# Altium PCB RF_REVE.PcbDoc
Units mm, origin at the board's own origin, x right, y up, seen from the top; angles counter-clockwise.
Board outline 95.88 x 101.01 mm, 4 copper layers (Top Layer, Layer 1, Layer 2, Bottom Layer), stack 1.586 mm thick; 16 components, 36 nets, 192 pads, 59 vias.
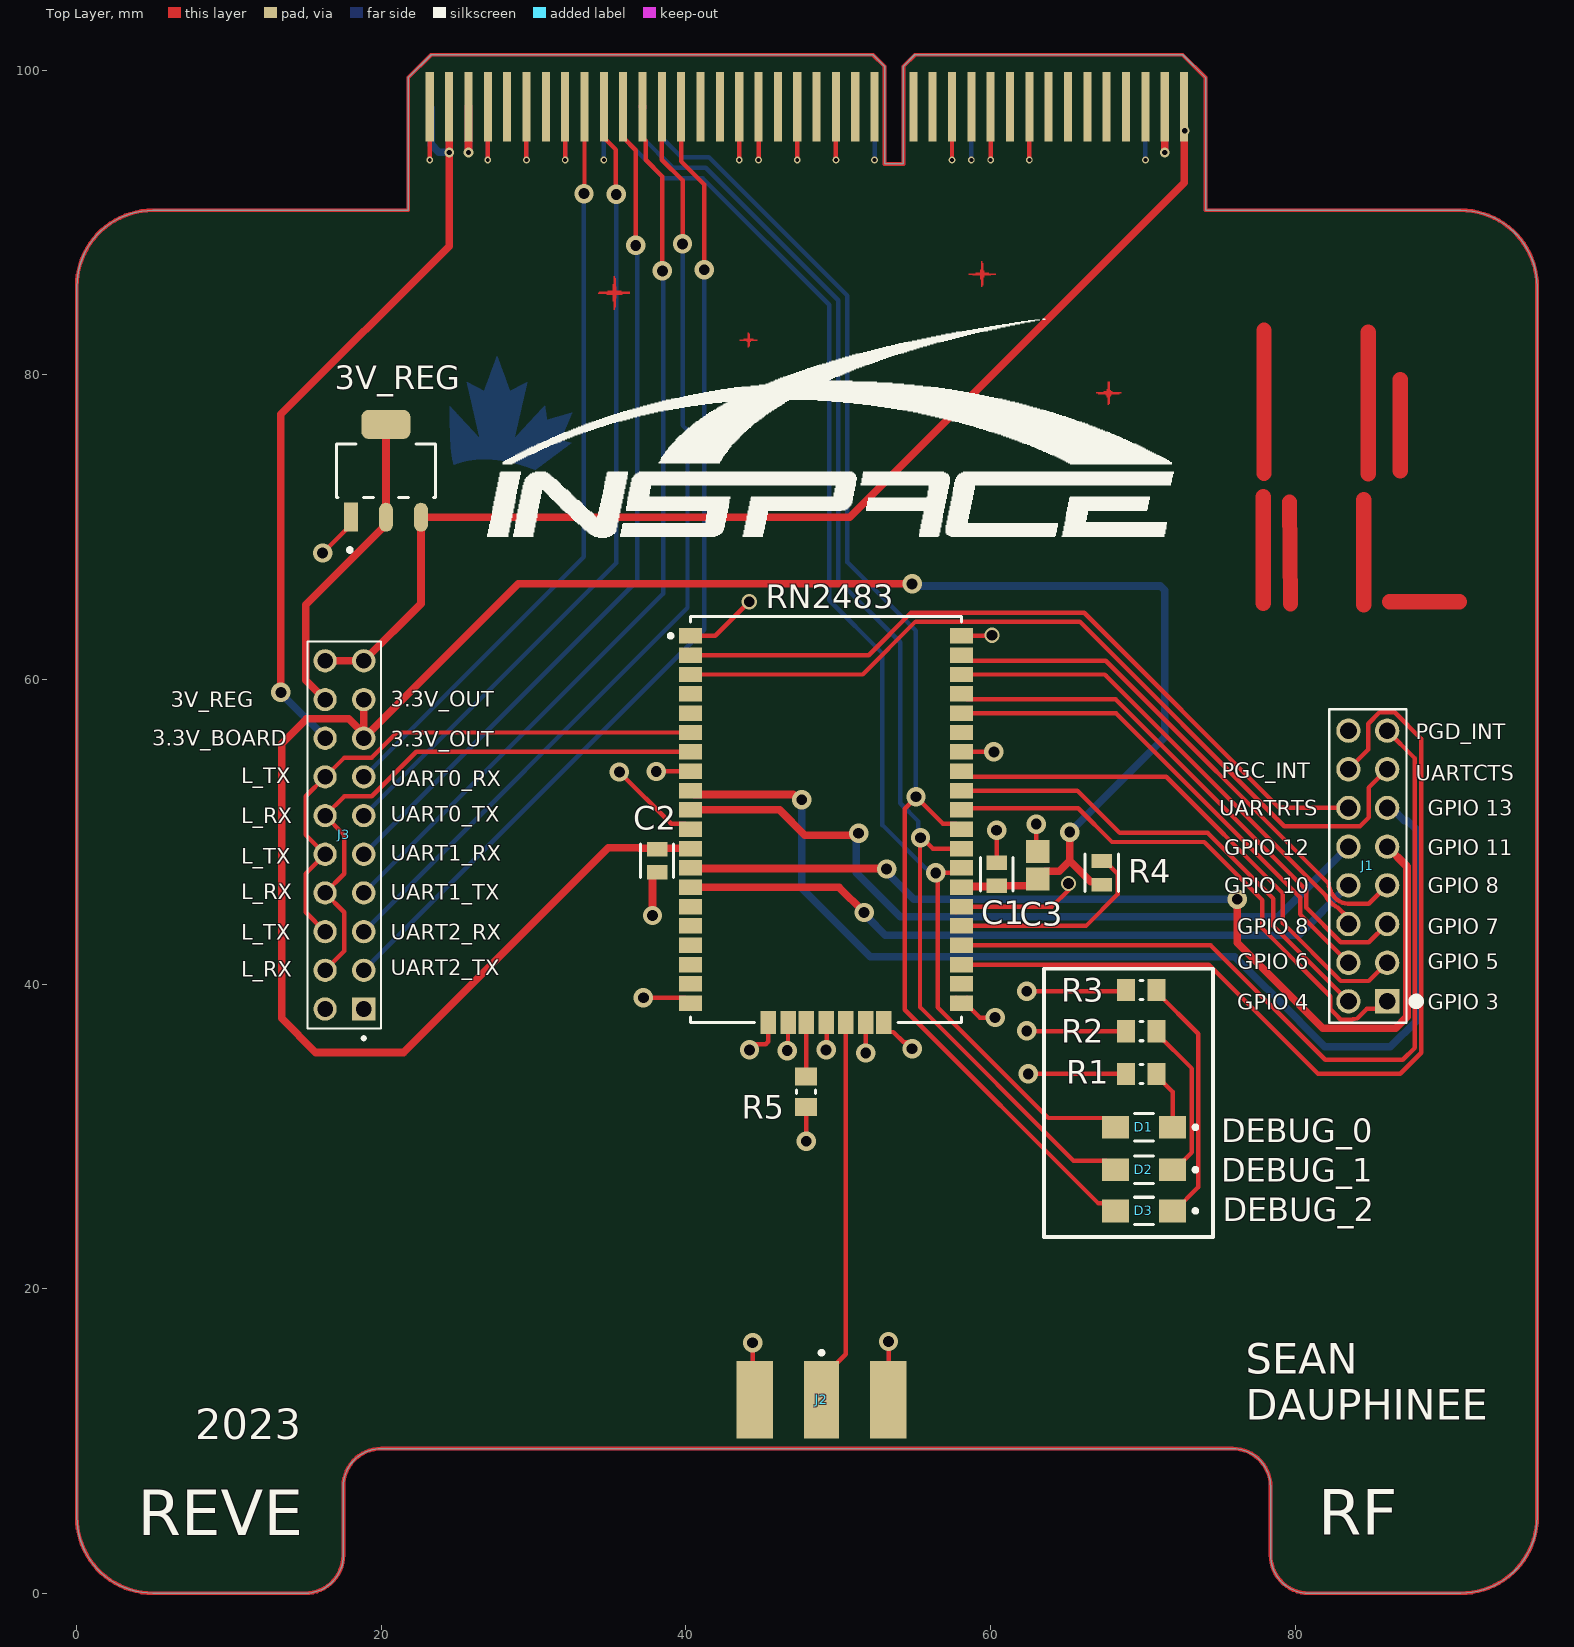
[diagram p0: Top Layer view]
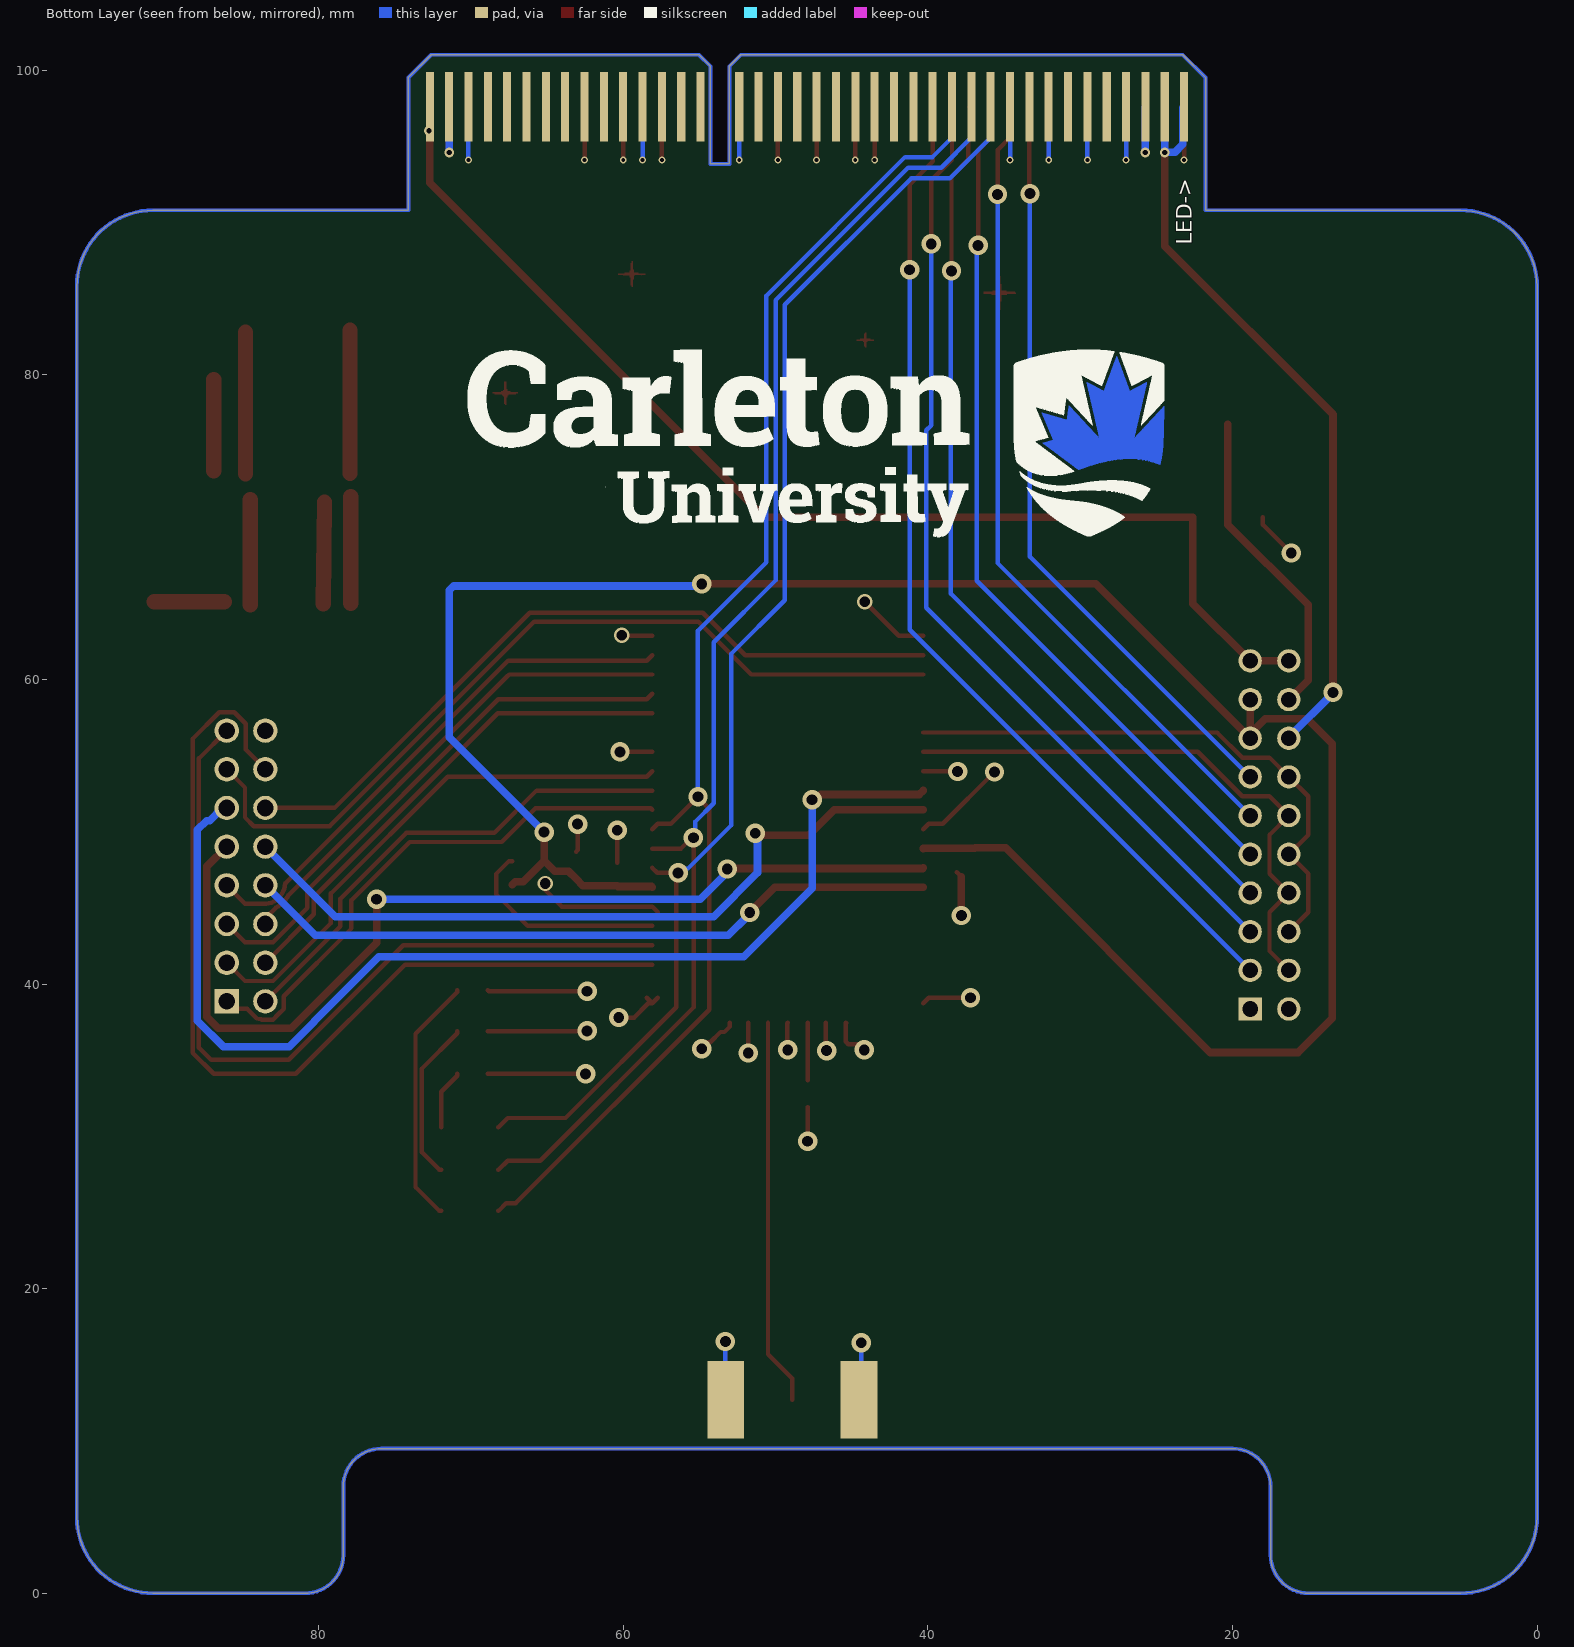
[diagram p1: Bottom Layer view, seen from below]
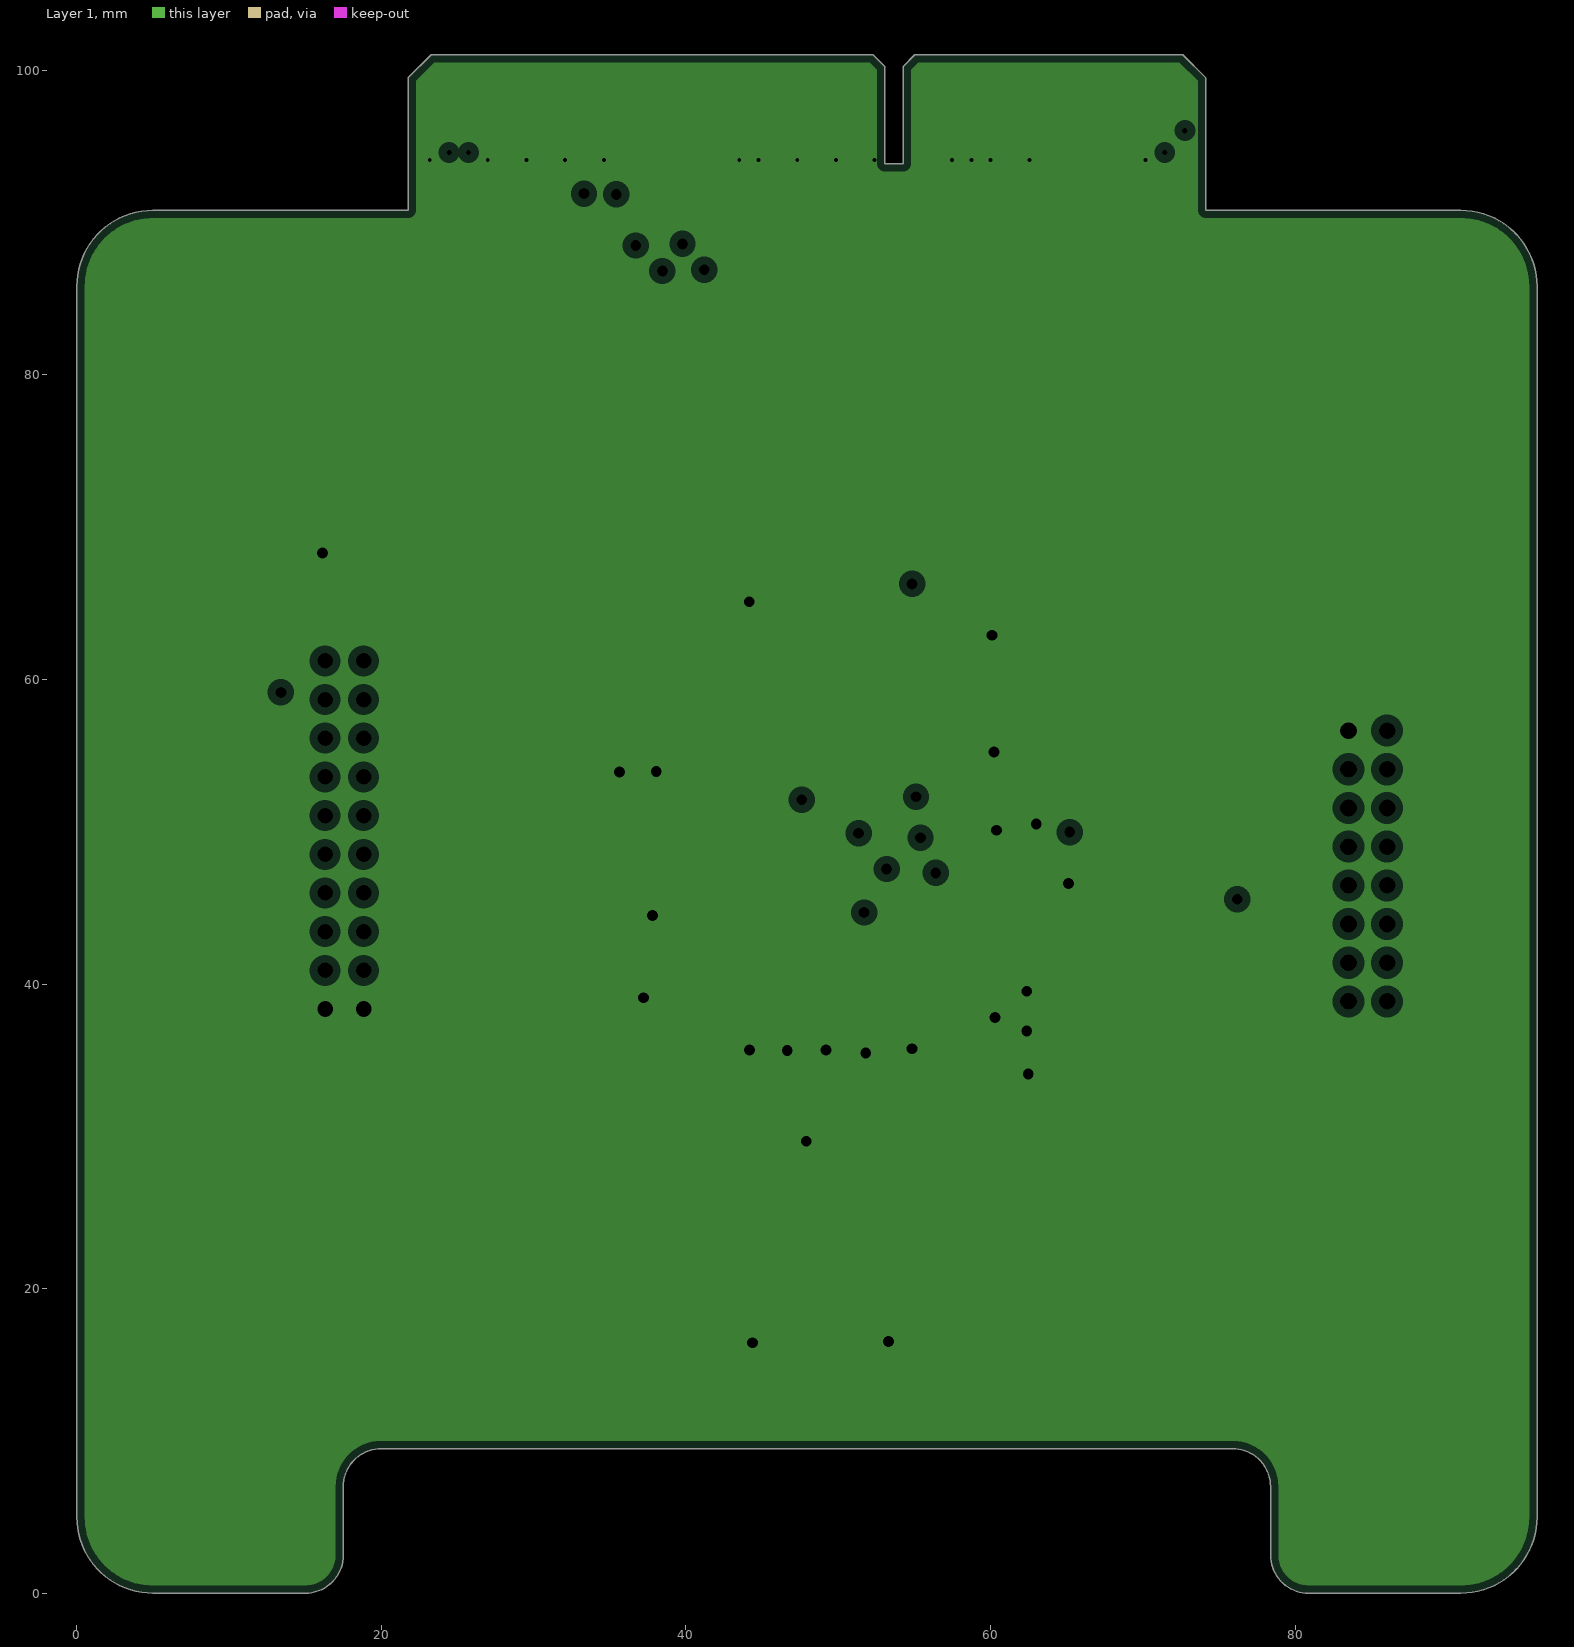
[diagram p2: Layer 1, clearances drawn from the general rule]
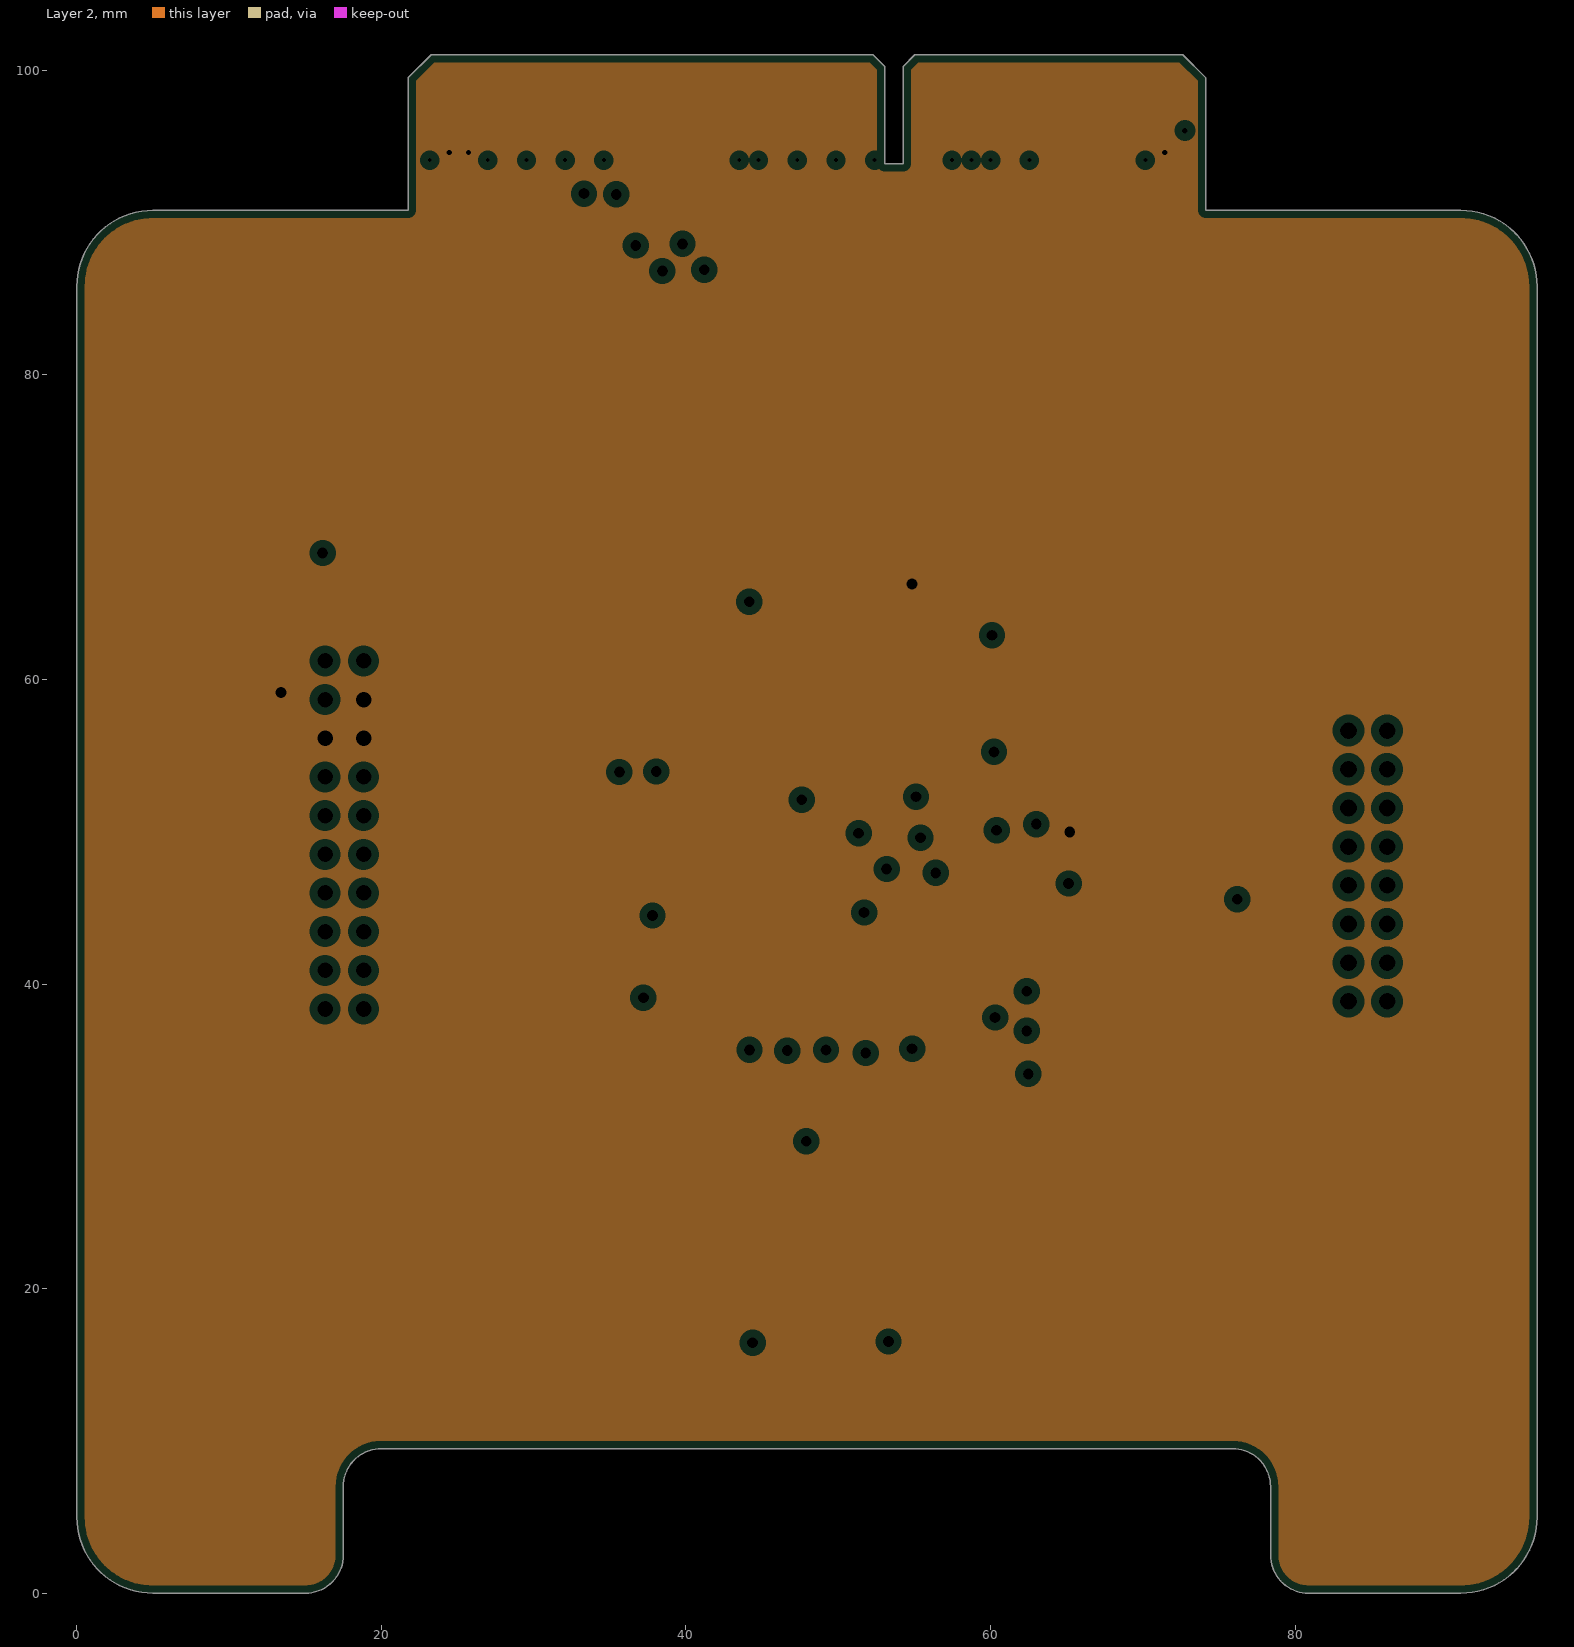
[diagram p3: Layer 2, clearances drawn from the general rule]
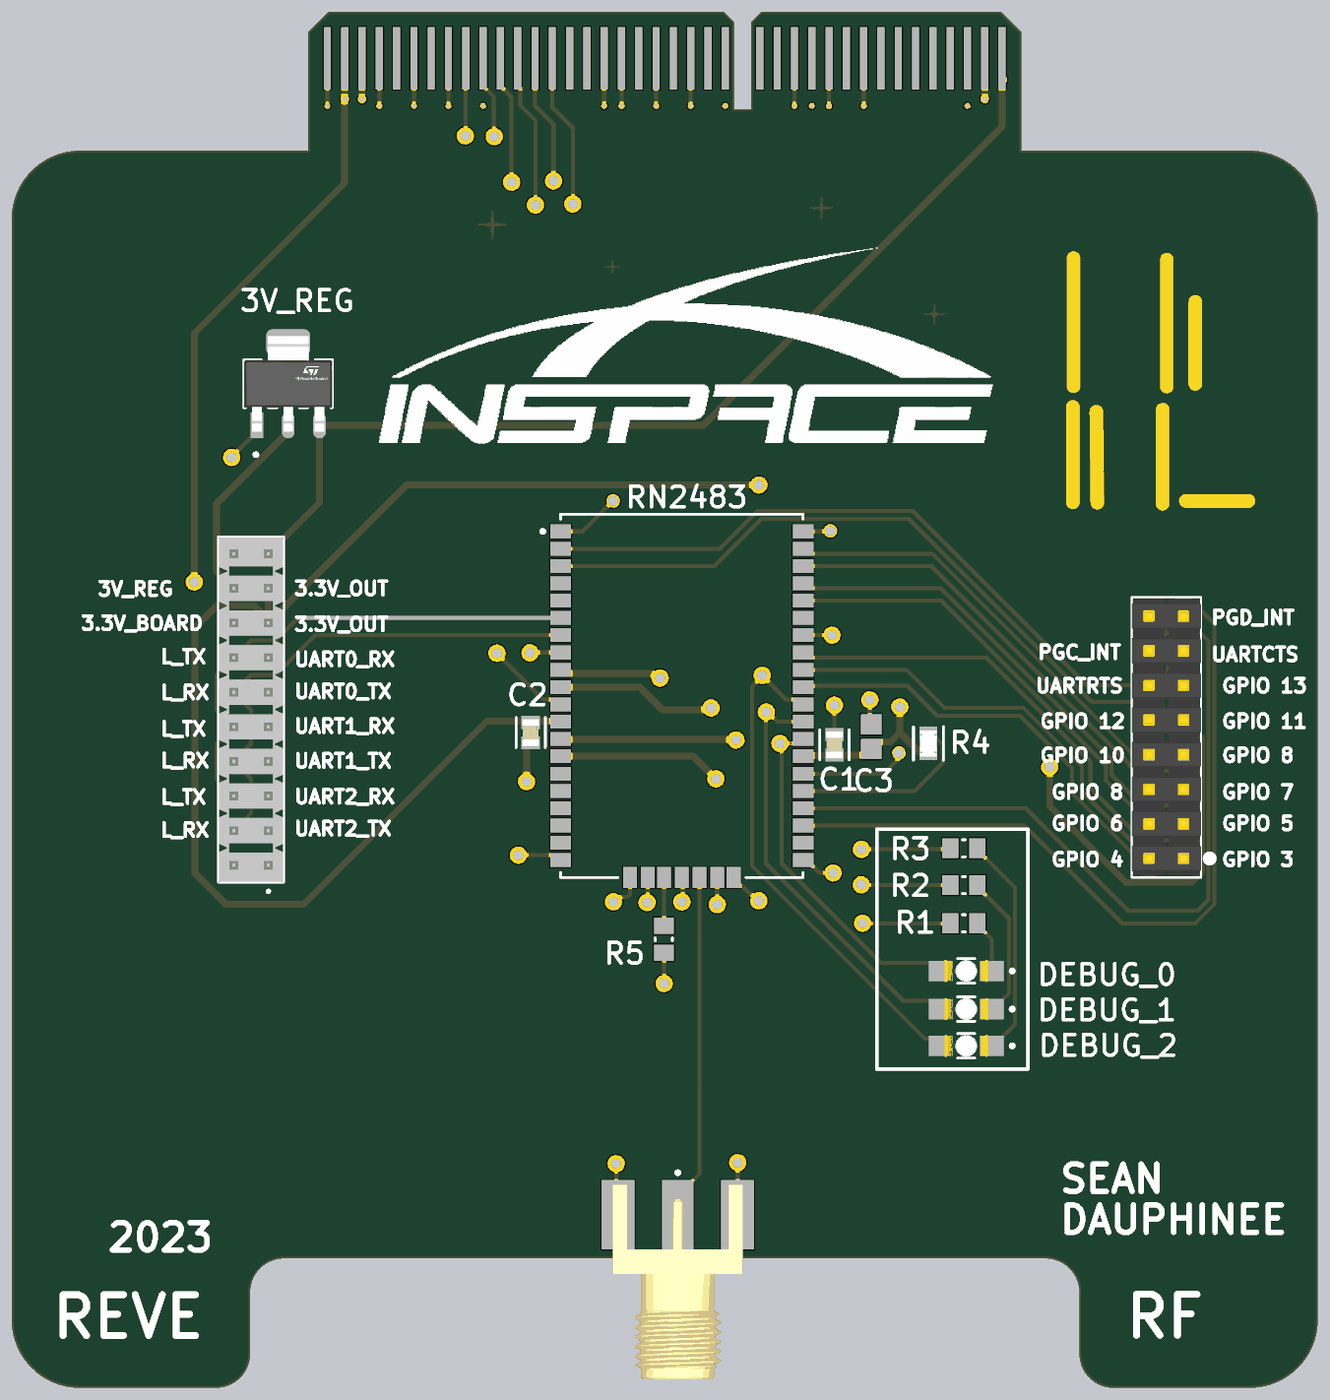
[diagram p4: 3D render of the assembled board from above, using the file's embedded part models]

## Layer stack, top to bottom
Top Solder: solder mask 0.0203, Solder Resist, Dk 3.8
Top Layer: signal copper 0.035
Dielectric 2: prepreg 0.2104, PP-006, Dk 4.6
Layer 1: plane copper 0.0152, net GND
Dielectric 1: dielectric 1.065, FR-4, Dk 4.6
Layer 2: plane copper 0.0152, net +3.3V
Dielectric 3: prepreg 0.2104, PP-006, Dk 4.6
Bottom Layer: signal copper 0.035
Bottom Solder: solder mask 0.0203, Solder Resist, Dk 3.8

## Board outline
5,0 15,0 ccw(c15,2.5) 17.5,2.5 17.5,7 cw(c20,7) 20,9.5 75.885,9.5 cw(c75.885,7) 78.385,7 78.385,2.5 ccw(c80.885,2.5) 80.885,0 90.885,0 ccw(c90.885,5) 95.885,5 95.885,85.805 ccw(c90.885,85.805) 90.885,90.805 74.117,90.805 74.117,99.517 72.617,101.015 55.027,101.015 54.277,100.265 54.277,93.855 53.037,93.855 53.037,100.265 52.287,101.015 23.267,101.015 21.767,99.517 21.768,90.805 5,90.805 ccw(c5,85.805) 0,85.805 0,5 ccw(c5,5)

## Design rules (kind name [scope] priority, off if disabled: settings)
Clearance [All] p1: gap=0.254 ignorepadtopadclearanceinfootprint=TRUE except(0: Arc-Hole Track-Hole SMDPad-Hole THPad-Hole Via-Hole Fill-Hole Poly-Hole Region-Hole Text-Hole; 0.127: Arc-Arc Arc-Track Track-Track SMDPad-SMDPad THPad-THPad)
PlaneClearance [All] p1: clearance=0.508
PlaneConnect [All] p1: pad.planeconnectstyle=Relief pad.reliefexpansion=0.508 pad.reliefentries=4 pad.reliefconductorwidth=0.254 pad.reliefairgap=0.254 via.planeconnectstyle=Direct via.reliefexpansion=0.508 via.reliefentries=4 via.reliefconductorwidth=0.254 via.reliefairgap=0.254
PolygonConnect [All] p1: connectstyle=Relief reliefconductorwidth=0.254 reliefentries=4 polygonreliefangle="90 Angle" airgapwidth=0.254
RoutingVias [All] p1: holewidth=0.254 width=0.445 viastyle="Through Hole" minholewidth=0.2 minwidth=0.4 maxholewidth=6.3 maxwidth=6.4
SolderMaskExpansion [All] p1: expansion=0.102 istentingtop=FALSE
Width [All] p1: maxlimit=2.5 minlimit=0.127 preferedwidth=0.293 minimp=50.000000 maximp=50.000000 favimp=50.000000
28 further rules are at their usual default settings.

## Classes and differential pairs
component class RF_REVE[2]: D1 D2 D3 J2 R1 R2 R3
component class RF_REVE[1]: 3V_REG C1 C2 C3 J1 J3 R4 R5 RN2483

## Components (designator, comment, footprint, x,y, rotation, side; value= is the part's Value field where it differs from the comment)
3V_REG "LDL1117S33R" FP-SOT223-0046067-IPC_B 20.3,73.7 r90 top (schematic designator U2)
C1 "0.1 uF" FP-C0805C-DN-MFG 60.4,47.2 r90 top value="0.10 μF"
C2 "0.1 uF" FP-C0805C-DN-MFG 38.1,48.1 r270 top value="0.10 μF"
C3 "2.2 uF" CAPC2013X145X50ML20T25 63.1,47.8 r270 top
D1 "LED 1" FP-APTD3216CGCK-MFG 70.075,30.6 r180 top
D2 "LED 2" FP-APTD3216CGCK-MFG 70.075,27.8 r180 top
D3 "LED 3" FP-APTD3216CGCK-MFG 70.075,25.1 r180 top
J1 "68602-116HLF" CONN_68602-116HLF_AMP 86.04,38.86 r90 top
J2 "Antenna" CINC-142-0701-801_V 48.9,12.7 r270 top
J3 "10129381-920001BLF" AMPHENOL_10129381-920001BLF 17.57,49.79 r90 top
R1 "1.8k" RESC2013X60X35ML10T20 69.9,34.1 r0 top
R2 "1.8k" RESC2013X60X35ML10T20 69.9,36.9 r0 top
R3 "1.8k" RESC2013X60X35ML10T20 69.9,39.6 r0 top
R4 "10k" FP-MC01W0805-IPC_C 67.3,47.3 r270 top
R5 "50" RESC2013X60X35ML10T20 47.875,32.925 r90 top
RN2483 "RN2483-I/RM095" MCHP-RN2483-47_V 49.2,50.8 r180 top (schematic designator U1)

## Footprints (in the part's own frame and the unit in brackets; to place one, negate y for a bottom-side part, rotate by r counter-clockwise, add the part's x,y. Pads: shape width x height; smd on the part's side, far side on the other; paste and mask are expansions set on the pad)
AMPHENOL_10129381-920001BLF [mm]
  rect 1.53x1.53 hole 1.02: 01(-11.43,-1.27)
  round 1.53 hole 1.02: 02(-11.43,1.27) 03(-8.89,-1.27) 04(-8.89,1.27) 05(-6.35,-1.27) 06(-6.35,1.27) 07(-3.81,-1.27) 08(-3.81,1.27) 09(-1.27,-1.27) 10(-1.27,1.27) 11(1.27,-1.27) 12(1.27,1.27) 13(3.81,-1.27) 14(3.81,1.27) 15(6.35,-1.27) 16(6.35,1.27) 17(8.89,-1.27) 18(8.89,1.27) 19(11.43,-1.27) 20(11.43,1.27)
  silkscreen extent -13.45,-2.41 12.7,2.41, body extent -12.7,-2.41 12.7,2.41, height 3.25
CAPC2013X145X50ML20T25 [mm] "Chip Capacitor, 2-Leads, Body 2.00x1.25mm, IPC Low Density"
  rect 1.5x1.55 smd: 1(-0.9,0) 2(0.9,0)
  body extent -1.1,-0.72 1.1,0.72, height 1.45
CINC-142-0701-801_V [mil] "SMA Connector, 5-Leads, Body 14.275x9.525mm"
  rect 200x90 smd: 1(0,0)
  rect 200x95 smd: 2(0,172.5) 3(0,-172.5)
  rect 200x95 smd far side: 4(0,172.5)
  rect 200x95 smd far side mask+0: 5(0,-172.5)
  silkscreen extent -127,-5 -117,5, body extent -87,-187 475,188, height 171
CONN_68602-116HLF_AMP [mil]
  rect 63x63 hole 43 mask+0: 1(0,0)
  round 63 hole 43 mask+0: 2(0,100) 3(100,0) 4(100,100) 5(200,0) 6(200,100) 7(300,0) 8(300,100) 9(400,0) 10(400,100) 11(500,0) 12(500,100) 13(600,0) 14(600,100) 15(700,0) 16(700,100)
  silkscreen extent -55,-85 755,150, body extent -50,-50 750,150, height 385
FP-APTD3216CGCK-MFG [mm]
  rect 1.75x1.5 smd paste+0 mask+0: 1(-1.875,0) 2(1.875,0)
  silkscreen extent -3.5,-0.9 0.63,0.9, body extent -2.85,-1 2.85,1, height 0.25
FP-C0805C-DN-MFG [mm]
  rect 0.95x1.35 smd paste+0 mask+0: 1(-0.75,0) 2(0.75,0)
  silkscreen extent -1.1,-1.07 1.1,1.07, body extent -1.4,-0.85 1.4,0.85, height 0.25
FP-MC01W0805-IPC_C [mm]
  rect 0.906x1.316 smd paste+0 mask+0: 1(-0.776,0) 2(0.776,0)
  silkscreen extent -1.23,-1.1 1.23,1.1, body extent -1.33,-0.8 1.33,0.8, height 0.25
FP-SOT223-0046067-IPC_B [mm]
  rect 1.904x0.92 smd paste+0 mask+0: 1(-3.05,2.3)
  rrect100% 1.904x0.92 smd paste+0 mask+0: 2(-3.05,0) 3(-3.05,-2.3)
  rrect48% 1.904x3.22 smd paste+0 mask+0: 4(3.05,0)
  silkscreen extent -5.32,-3.25 1.75,3.25, body extent -4.25,-3.5 4.25,3.5, height 0.25
MCHP-RN2483-47_V [mil] "47-Leads, Body 26.67x17.8mm, Pitch 1.27mm"
  rect 60x40 smd mask+3.94: 1(350.39,-475) 2(350.39,-425) 3(350.39,-375) 4(350.39,-325) 5(350.39,-275) 6(350.39,-225) 7(350.39,-175) 8(350.39,-125) 9(350.39,-75) 10(350.39,-25) 11(350.39,25) 12(350.39,75) 13(350.39,125) 14(350.39,175) 15(350.39,225) 16(350.39,275) 17(350.39,325) 18(350.39,375) 19(350.39,425) 20(350.39,475) 28(-350.39,475) 29(-350.39,425) 30(-350.39,375) 31(-350.39,325) 32(-350.39,275) 33(-350.39,225) 34(-350.39,175) 35(-350.39,125) 36(-350.39,75) 37(-350.39,25) 38(-350.39,-25) 39(-350.39,-75) 40(-350.39,-125) 41(-350.39,-175) 42(-350.39,-225) 43(-350.39,-275) 44(-350.39,-325) 45(-350.39,-375) 46(-350.39,-425) 47(-350.39,-475)
  rect 40x60 smd mask+3.94: 21(149.61,525) 22(98.43,525) 23(51.18,525) 24(0,525) 25(-51.18,525) 26(-102.36,525) 27(-149.61,525)
  silkscreen extent -350,-525 407,525, body extent -350,-525 350,525, height 118
RESC2013X60X35ML10T20 [mm] "Chip Resistor, 2-Leads, Body 2.00x1.25mm, IPC Low Density"
  rect 1.2x1.45 smd: 1(-1,0) 2(1,0)
  silkscreen extent -0.1,-0.63 0.1,0.63, body extent -1.05,-0.67 1.05,0.67, height 0.6

## Part data
3V_REG: library part CMP-006-000017-2, "1.2AHIGHPSRRLOWDROPOUTLINE", Case/Package=SOT-223-4, Dropout Voltage=350mV, Max Operating Temperature=125°C, Max Supply Voltage=18V, Min Input Voltage=2.5V, Min Operating Temperature=-40°C, Min Output Voltage=3.3V, Output Current=1.2A, Package=SOT223, Package Quantity=2500, Power Supply Rejection Ratio (PSRR)=65dB, Quiescent Current=250uA, Component Type=Standard, Design Item ID=LDL1117S33R, DeviceSetName=LDL1117S33R, GateName_1=G$1, LibraryName="MCU Board", Mounting Technology="Surface Mount", Number of Outputs=1, Number of Regulators=1, Output Configuration=Positive, Output Type=Fixed, Output Voltage=3.3V, Packaging="Tape and Reel", Pin Count=3, RoHS Compliant=Yes, Series=LDL1117, Source="MCU Board.SCHLIB", SymbolName_1=LDL1117, Weight=0.009171oz
C1 C2: library part CMP-2007-00279-2, "CAP CER 0.1UF 50V X7R 0805", Capacitance="0.10 μF", Manufacturer=KEMET, Manufacturer Part Number=C0805C104K5RACTU, Package=C0805C-DN, Temperature="-55°C to +125°C", Temperature Characteristic=X7R, Temperature Coefficient=30ppm/°C, Temperature Range High=+125°C, Temperature Range Low=-55°C, Tolerance=0.1, Voltage Rating="50 V", Automotive=No, Category=Cap, ComponentLink2Description=Datasheet, ComponentLink2URL=https://content.kemet.com/datasheets/KEM_C1003_C0G_SMD.pdf, Device Class L1="Passive Components", Device Class L2=Capacitors, Device Class L3="Ceramic Capacitors", Digikey Description="CAP CER 0.1UF 50V X7R 0805", Height=0.88mm, Ipc Land Pattern Name=CAPC200125X78, Lead Free=Yes, Material=Ceramic, Mouser Description="Cap Ceramic 0.1uF 50V X7R 10% SMD 2.0 x 1.2 mm 125 C Paper T/R", Octopart=https://octopart.com/c0805c104k5ractu-kemet-143926, RoHS=TRUE
C3: library part CMP-2007-01011-1, Manufacturer=Kemet, Part Number=C0805C225K8PACTU
D1 D2 D3: library part CMP-2000-05792-2, "LED GREEN CLEAR 2SMD", Case Code (Imperial)=1206, Case Code (Metric)=3216, Color=Green, Forward Current=20mA, Forward Voltage=2.1V, Lens Color=Clear, Max Operating Temperature=85°C, Min Operating Temperature=-40°C, Package Quantity=2000, Case/Package=1206, Dominant Wavelength=570nm, Height=1.8mm, Illumination Color=Green, Lead Free="Lead Free", Length=3.2mm, Lens Style=Clear, Luminous Intensity=300mcd, Mount="Surface Mount", Number of LEDs=1, Number of Pins=2, Packaging="Tape and Reel", Test Current=20mA, Viewing Angle=50°, Width=1.6mm
J1: library part CMP-013-000001-2, "No Description Available", Mfr_Name="Amphenol ICC", Copyright="Copyright (C) 2023 Ultra Librarian. All rights reserved.", Design Item ID=68602-116HLF, Digi-Key_Part_Number_1=609-3364-ND, Manufacturer_Part_Number=68602-116HLF, RefDes=RefDes, Source=68602-116HLF.SchLib, Type=DEV
J2: library part CMP-2000-05490-1, "SMA End Launch Jack Receptacle, 50 Ohm, 0 to 18 GHz, -65 to 165 degC, 5-Pin SMD, RoHS, Bulk", Manufacturer=EmersonConnectivitySolutions, Maximum Frequency=18GHz, Operating Temperature Range=-65Cto+165C, Package Description="5-Pin Surface Mount Device, Body 14.275 x 9.525 mm", Package Reference=142-0701-801, Body Material=Brass, Body Style=Straight, Brand=Johnson/EmersonConnectivitySolutions, Connector Type=JackPCB, Contact Plating=Gold, Datasheet URL=https://belfuse.com/resources/Johnson/productinformation/pi-142-0701-801.pdf, Datasheet Version=12/2014, Factory Pack Quantity=5, Gender=Jack(Female), Impedance=50Ohms, Manufacturer URL=http://www.cinch.com/, Mounting Technology=SurfaceMount, Orientation=Straight, Package URL=https://belfuse.com/resources/Johnson/drawings/dr-1420701801.pdf, Product=Connectors, Product Category=RFConnectors/CoaxialConnectors, RF Series=SMA, RoHS=Details, Series=SMA, Termination Style=Solder
J3: library part CMP-009-000000-2, "EconoStikâ„¢, Board to Board connector, Unshrouded Vertical Header, Through Hole, Double Row, 20 Positions, 2.54 mm (0.100in) Pitch.", Package=None, Check_prices=https://www.snapeda.com/parts/10129381-920001BLF/Amphenol+FCI/view-part/?ref=eda, Component Type=Standard, Design Item ID=10129381-920001BLF, Digi-Key_Part_Number=10129381-920001BLF-ND, MF="Amphenol ICC (FCI)", MP=10129381-920001BLF, Pin Count=20, Purchase-URL=https://pricing.snapeda.com/search/part/10129381-920001BLF/?ref=eda, SnapEDA_Link=https://www.snapeda.com/parts/10129381-920001BLF/Amphenol+FCI/view-part/?ref=snap, Source=10129381-920001BLF.SchLib
R1 R2 R3 R5: library part CMP-2001-04564-1, Manufacturer=Yageo, Part Number=RC0805FR-131K8L
R4: library part CMP-12256-000003-1, "Resistor, 10K, 0.1W, 1%, 0805, Reel", Case Code (Imperial)=0805, Case Code (Metric)=2012, Max Operating Temperature=155°C, Min Operating Temperature=-55°C, Power Rating=100mW, Resistance=10kR, Temperature Coefficient=100ppm/°C, Tolerance=1%, Voltage Rating=150V, Case/Package=0805, Composition="Thick Film", Number of Pins=2, Packaging="Cut Tape", REACH SVHC="No SVHC", Voltage Rating (DC)=150V, Width=1.25mm
RN2483: library part CMP-2000-05219-1, "Low-Power Long Range LoRa(TM) Technology Transceiver Module, 2.1 to 3.6 V, -40 to 85 degC, 47-Pin SMD, RoHS", Manufacturer=Microchip, Maximum Operating Supply Voltage=3.6V, Maximum Operating Temperature=+85degC, Minimum Operating Supply Voltage=2.1V, Minimum Operating Temperature=-40degC, Operating Band Frequency Range=438,868MHz, Operating Supply Voltage Range=2.1to3.6V, Operating Temperature Range=-40to+85degC, Package Type=Module, Datasheet URL=http://datasheet.octopart.com/RN2483-I-RM095-Microchip-datasheet-44892142.pdf, Datasheet Version="Rev. A, 03/2015", Dimensions=17.8x26.7x3mm, Height=3mm, Length=26.7mm, Manufacturer URL=http://www.microchip.com/, Mounting Type=SurfaceMount, Pin Count=47, Width=17.8mm

## Free pads (board coordinates)
  rect 0.53x4.572 smd: 1(72.707,97.6) 3(71.437,97.6) 5(70.167,97.6) 7(68.897,97.6) 9(67.627,97.6) 11(66.357,97.6) 13(65.087,97.6) 15(63.817,97.6) 17(62.547,97.6) 19(61.277,97.6) 21(60.007,97.6) 23(58.737,97.6) 25(57.467,97.6) 27(56.197,97.6) 29(54.927,97.6) 31(52.387,97.6) 33(51.117,97.6) 35(49.847,97.6) 37(48.577,97.6) 39(47.307,97.6) 41(46.037,97.6) 43(44.767,97.6) 45(43.497,97.6) 47(42.227,97.6) 49(40.957,97.6) 51(39.687,97.6) 53(38.417,97.6) 55(37.147,97.6) 57(35.877,97.6) 59(34.607,97.6) 61(33.337,97.6) 63(32.067,97.6) 65(30.797,97.6) 67(29.527,97.6) 69(28.257,97.6) 71(26.987,97.6) 73(25.717,97.6) 75(24.447,97.6) 77(23.177,97.6)
  rect 0.53x4.572 smd far side: 2(72.707,97.6) 4(71.437,97.6) 6(70.167,97.6) 8(68.897,97.6) 10(67.627,97.6) 12(66.357,97.6) 14(65.087,97.6) 16(63.817,97.6) 18(62.547,97.6) 20(61.277,97.6) 22(60.007,97.6) 24(58.737,97.6) 26(57.467,97.6) 28(56.197,97.6) 30(54.927,97.6) 32(52.387,97.6) 34(51.117,97.6) 36(49.847,97.6) 38(48.577,97.6) 40(47.307,97.6) 42(46.037,97.6) 44(44.767,97.6) 46(43.497,97.6) 48(42.227,97.6) 50(40.957,97.6) 52(39.687,97.6) 54(38.417,97.6) 56(37.147,97.6) 58(35.877,97.6) 60(34.607,97.6) 62(33.337,97.6) 64(32.067,97.6) 66(30.797,97.6) 68(29.527,97.6) 70(28.257,97.6) 72(26.987,97.6) 74(25.717,97.6) 76(24.447,97.6) 78(23.177,97.6)

## Via types
v1: diameter 1.27, hole 0.711, Top Layer to Bottom Layer, 37 vias
v2: diameter 0.444, hole 0.254, Top Layer to Bottom Layer, 15 vias
v3: diameter 0.635, hole 0.356, Top Layer to Bottom Layer, 4 vias
v4: diameter 1, hole 0.711, Top Layer to Bottom Layer, 3 vias

## Nets (pads, with @x,y where several pads share a name; then routed paths per layer and width w, separated by ;. In a path a pad name is that pad's centre, name@x,y a point inside that pad or via, vN(x,y) a via of type N, cw(c..) or ccw(c..) an arc to the next point about the centre after c; other vN are vias at no path point)
3V_REG: 3V_REG.2 3V_REG.4 J3.18 | length 20.8
  Top Layer w0.5: J3.18 15.031,59.949 15.031,64.889 20.3,70.158 3V_REG.2 3V_REG.4
5V: 3V_REG.3 J3.19 J3.20 pad.1 pad.2 | length 79.4
  Top Layer w0.5: J3.20 J3.19 22.6,64.98 3V_REG.3 50.75,70.65 72.707,92.607 pad.1@72.707,96.039 ; pad.1 pad.1@72.707,96.039 ; v3(72.759,96.039) pad.1@72.707,96.039
  Bottom Layer w0.5: pad.2 72.707,96.039 v3(72.759,96.039)
+3.3V: C1.1 C2.1 C3.2 J3.15 J3.16 J3.17 pad.3 pad.4 pad.73 pad.74 pad.75 pad.76 pad.78 R4.2 RN2483.12 RN2483.34 | length 214
  Top Layer w0.5: v1(13.4,59.153) 13.4,77.4 24.447,88.447 v3(24.447,94.6) ; J3.17 J3.15@18.84,56.419 ; v3(24.447,94.6) pad.75 ; v3(25.717,94.6) pad.73 ; RN2483.12 40.273,48.923 36.928,48.923 36.9,48.95 34.9,48.95 21.45,35.5 15.7,35.5 13.45,37.75 13.45,55.775 15.084,57.409 17.85,57.409 J3.15@18.84,56.419 ; v1(54.85,66.275) 28.975,66.275 J3.15 J3.15@18.84,56.419 ; RN2483.34 58.148,46.403 60.353,46.403 C1.1 62.65,46.45 C3.2 63.6,47.4 64.5,47.4 65.2,48.1 ; v1(65.2,49.973) 65.2,48.1 ; R4.2 67.097,46.727 66.573,46.727 65.2,48.1 ; v3(71.437,94.6) pad.3
  Bottom Layer w0.5: v1(13.4,59.153) 13.4,59.096 16.3,56.196 J3.16 ; pad.78 23.257,97.52 23.257,95.143 23.774,94.626 24.421,94.626 v3(24.447,94.6) pad.76 ; v3(25.717,94.6) pad.74 ; v1@55.213,66.137 71.144,66.137 71.437,65.844 71.437,56.21 v1(65.2,49.973) ; v3(71.437,94.6) pad.4
ANT: J2.1 RN2483.25 | length 25.4
  Top Layer w0.293: J2.1 48.9,14.097 50.5,15.697 RN2483.25
GND: 3V_REG.1 C1.2 C2.2 C3.1 J1.16 J2.2 J2.3 J2.4 J2.5 J3.01 J3.02 pad.6 pad.17 pad.21 pad.24 pad.25 pad.32 pad.35 pad.39 pad.43 pad.45 pad.60 pad.63 pad.64 pad.67 pad.68 pad.71 pad.72 pad.77 R1.1 R2.1 R3.1 R5.1 RN2483.1 RN2483.8 RN2483.11 RN2483.20 RN2483.21 RN2483.22 RN2483.24 RN2483.26 RN2483.27 RN2483.28 RN2483.33 RN2483.41 RN2483.47 | length 152.5
  Top Layer w0.293: v1(16.142,68.3) 18,70.158 3V_REG.1 ; v2(23.177,94.1) pad.77 ; v2(26.987,94.1) pad.71 ; v2(29.527,94.1) pad.67 ; v2(32.067,94.1) pad.63 ; v1(35.625,53.925) 39.024,50.527 39.939,50.527 RN2483.11 ; v1(37.2,39.1) 37.203,39.097 39.939,39.097 RN2483.20 ; C2.2@37.8,47.05 C2.2 ; v1(38.05,53.95) 38.075,53.975 RN2483.8 ; RN2483.1 41.915,62.865 v4(44.15,65.1) ; v2(43.497,94.1) pad.45 ; v1(44.175,35.675) 44.55,36.05 45.228,36.05 45.4,36.222 RN2483.21 RN2483.21@45.375,37.44 ; v1(44.375,16.45) 44.375,12.844 J2.3 ; v2(44.767,94.1) pad.43 ; v1@46.7,36.05 RN2483.22 ; v2(47.307,94.1) pad.39 ; R5.1 47.9,31.9 v1(47.9,29.675) ; RN2483.24 49.25,37.415 v1@49.25,36.225 ; v2(49.847,94.1) pad.35 ; v1(51.8,35.475) RN2483.26 ; RN2483.27 53,37.211 53.362,36.849 53.616,36.849 54.29,36.175 54.678,36.175 54.85,36.003 v1(54.85,35.75) ; J2.2 53.3,12.718 v1(53.3,16.525) ; v2(57.467,94.1) pad.25 ; RN2483.28@57.739,39.097 RN2483.28 ; RN2483.33@57.739,44.723 RN2483.33 64.035,45.085 65.125,46.175 v4(65.125,46.6) ; RN2483.41 v1(60.22,55.245) ; RN2483.47 v4@59.835,62.865 ; RN2483.28@58.462,39.097 RN2483.28 ; v2(60.007,94.1) pad.21 ; v1(60.3,37.8) 59.289,37.8 58.354,38.735 RN2483.28 ; C1.2 v1(60.4,50.1) ; v1(62.375,39.525) 68.825,39.525 R3.1 ; v1(62.475,34.1) R1.1 ; v2(62.547,94.1) pad.17 ; v1@62.65,36.9 R2.1 ; v1(63,50.5) 63,48.8 C3.1
  Top Layer w0.5: v1(37.8,44.5) C2.2@37.8,47.05
  Bottom Layer w0.293: v2(26.987,94.1) pad.72 ; v2(29.527,94.1) pad.68 ; v2(32.067,94.1) pad.64 ; v2(34.607,94.1) pad.60 ; v1(44.375,16.45) 44.375,12.844 J2.5 ; v2(52.387,94.1) pad.32 ; J2.4 53.3,12.718 v1(53.3,16.525) ; v2(58.737,94.1) pad.24 ; v2(70.167,94.1) pad.6
  other v1: 46.65,35.625 49.2,35.675 62.375,36.925
  other v4: 60.1,62.9
GPIO0: D1.2 pad.58 RN2483.35 | length 86.2
  Top Layer w0.292: RN2483.35 57.775,47.3 v1(56.4,47.3) 56.518,47.182 56.518,38.481 63.795,31.204 67.596,31.204 D1.2
  Bottom Layer w0.292: pad.58 35.877,95.579 38.556,92.9 41.1,92.9 49.4,84.6 49.4,65.2 52.9,61.7 52.9,50.437 55.752,47.585 55.85,47.585 56.135,47.3 v1(56.4,47.3)
GPIO1: D2.2 pad.56 RN2483.36 | length 88.2
  Top Layer w0.292: RN2483.36 56.213,48.895 55.508,49.6 v1(55.4,49.6) 55.365,49.565 55.365,38.485 65.446,28.404 67.596,28.404 D2.2
  Bottom Layer w0.292: pad.56 37.147,95.579 39.126,93.6 41.3,93.6 50,84.9 50,66.5 54.065,62.435 54.065,51.871 55.263,50.673 55.263,49.737 v1(55.4,49.6)
GPIO2: D3.2 pad.54 RN2483.37 | length 90.8
  Top Layer w0.292: RN2483.37 57.738,50.527 56.873,50.527 v1(55.1,52.3) 55.1,52.252 54.365,51.517 54.365,38.31 67.058,25.617 67.683,25.617 D3.2
  Bottom Layer w0.292: pad.54 38.417,95.579 39.696,94.3 41.5,94.3 50.6,85.2 50.6,67.7 55.1,63.2 v1(55.1,52.3)
L_RX: J3.04 J3.08 J3.12 RN2483.7 | length 38
  Top Layer w0.292: J3.04 17.569,42.169 17.569,44.711 J3.08 17.569,47.249 17.569,49.791 J3.12 17.571,52.331 19.366,52.331 22.28,55.245 RN2483.7
L_TX: J3.06 J3.10 J3.14 RN2483.6 | length 37.5
  Top Layer w0.292: J3.06 15.031,44.709 15.031,47.251 J3.10 15.031,49.789 15.031,52.331 J3.14 17.571,54.871 19.366,54.871 21.01,56.515 RN2483.6
NetD1_1: D1.1 R1.2 | length 3.9
  Top Layer w0.292: R1.2 70.9,33.975 71.95,32.925 D1.1
NetD2_1: D2.1 R2.2 | length 10.7
  Top Layer w0.292: R2.2 70.9,36.775 73.225,34.45 73.225,28.95 72.075,27.8 D2.1
NetD3_1: D3.1 R3.2 | length 16.4
  Top Layer w0.292: R3.2 70.9,39.475 73.644,36.731 73.644,26.669 72.075,25.1 D3.1
NetJ1_1: J1.1 RN2483.38 | length 35.8
  Top Layer w0.292: RN2483.38 58.2,51.535 65.765,51.535 67.975,49.325 74.025,49.325 77.85,45.5 77.85,43.651 82.3,39.201 82.3,38.86 82.3,38.363 82.651,38.011 83.003,37.66 83.5,37.66 83.747,37.66 83.781,37.693 cw(c83.848,37.409) 83.808,37.698 84.072,37.735 84.7,38.363 85.543,38.363 J1.1
NetJ1_2: J1.2 RN2483.39 | length 32.2
  Top Layer w0.292: RN2483.39 65.695,52.705 68.481,49.919 74.256,49.919 78.575,45.6 78.575,43.785 J1.2
NetJ1_3: J1.3 RN2483.40 | length 35.3
  Top Layer w0.292: RN2483.40 58.462,53.613 71.537,53.613 79.2,45.95 79.2,44.003 83.003,40.2 84.84,40.2 J1.3
NetJ1_4: J1.4 RN2483.43 | length 32.8
  Top Layer w0.292: RN2483.43 68.24,57.785 80.323,45.702 80.323,44.577 J1.4
NetJ1_5: J1.5 RN2483.44 | length 35.9
  Top Layer w0.292: RN2483.44 58.462,58.693 68.207,58.693 80.742,46.158 80.742,45.001 83.003,42.74 84.84,42.74 J1.5
NetJ1_6: J1.6 RN2483.45 | length 32.4
  Top Layer w0.292: RN2483.45 67.5,60.325 67.586,60.239 81.989,45.836 ccw(c83.773,46.752) 82.359,45.33 82.362,45.327 ccw(c83.5,46.479) 82.812,45.013 83.414,44.411 83.5,44.325 J1.6
NetJ1_7: J1.7 RN2483.46 | length 35.4
  Top Layer w0.292: RN2483.46 58.462,61.233 67.567,61.233 82.193,46.607 ccw(c83.773,46.752) 82.651,45.63 ccw(c83.5,46.479) 83.443,45.28 84.84,45.28 J1.7
NetJ1_8: J1.8 RN2483.14 | length 45.5
  Top Layer w0.5: RN2483.14 50.045,46.355 v1(51.7,44.7)
  Bottom Layer w0.5: v1@51.9,44.4 53.1,43.2 80.22,43.2 J1.8
NetJ1_9: J1.9 RN2483.13 | length 65.2
  Top Layer w0.5: RN2483.13 40.338,47.587 53.137,47.587 v1(53.175,47.55) ; v1(76.2,45.566) 76.2,42.7 81.8,37.1 86.593,37.1 87.344,37.851 87.344,47.716 J1.9
  Bottom Layer w0.5: v1(53.175,47.55) 53.175,47.342 54.951,45.566 v1(76.2,45.566)
NetJ1_10: J1.10 RN2483.10 | length 49.9
  Top Layer w0.5: RN2483.10 46.14,51.435 47.814,49.761 51.2,49.761 v1(51.339,49.9)
  Bottom Layer w0.5: v1(51.339,49.9) 51.192,49.753 51.192,47.295 54.06,44.427 78.907,44.427 J1.10
NetJ1_11: J1.11 RN2483.9 | length 73.8
  Top Layer w0.5: RN2483.9 40.558,52.447 47.045,52.447 47.392,52.1 v1(47.6,52.1)
  Bottom Layer w0.5: v1(47.6,52.1) 47.6,46.3 52.1,41.8 76.046,41.8 80.29,37.556 80.29,37.523 81.94,35.873 86.253,35.873 87.971,37.591 87.971,50.116 87.36,50.727 87.171,50.727 86.338,51.56 J1.11
NetR4_1: R4.1 RN2483.32 | length 13.9
  Top Layer w0.292: RN2483.32 66.268,43.815 68.358,45.905 68.358,47.223 67.505,48.076 R4.1
NetR5_2: R5.2 RN2483.23 | length 3.8
  Top Layer w0.292: R5.2@47.9,33.675 RN2483.23
PGC_INT: J1.14 RN2483.30 | length 62.4
  Top Layer w0.292: RN2483.30 74.325,41.275 81.5,34.1 86.9,34.1 88.286,35.486 88.286,56.091 86.537,57.84 85.543,57.84 84.8,57.097 84.8,55.4 J1.14
PGD_INT: J1.15 RN2483.31 | length 54.8
  Top Layer w0.292: RN2483.31 74.448,42.545 81.974,35.019 87.069,35.019 87.867,35.817 87.867,54.813 J1.15
UART0_RX: J3.13 pad.61 | length 50
  Top Layer w0.292: v1(33.3,91.9) 33.337,91.937 pad.61
  Bottom Layer w0.292: J3.13 33.3,68.06 v1(33.3,91.9)
UART0_TX: J3.11 pad.59 | length 53.7
  Top Layer w0.292: pad.59 34.607,95.579 35.4,94.786 35.4,92.508
  Top Layer w0.293: 35.4,92.508 35.4,91.875 v1(35.425,91.85)
  Bottom Layer w0.292: J3.11 35.425,67.645 v1(35.425,91.85)
UART1_RX: J3.09 pad.57 | length 56.6
  Top Layer w0.292: pad.57 35.877,95.579 36.7,94.756 v1(36.7,88.5)
  Bottom Layer w0.292: J3.09 36.8,66.48 v1@36.8,88.2
UART1_TX: J3.07 pad.55 | length 60.3
  Top Layer w0.292: pad.55@37.162,97.585 37.162,95.564 37.35,95.376 37.35,94.125 38.45,93.025 v1(38.45,86.825)
  Top Layer w0.5: pad.55 pad.55@37.162,97.585
  Bottom Layer w0.292: J3.07 38.5,65.64 38.5,86.775 v1(38.45,86.825)
UART2_RX: J3.05 pad.53 | length 63.7
  Top Layer w0.292: pad.53 38.417,94.133 39.775,92.775 v1(39.775,88.6)
  Bottom Layer w0.292: J3.05 40.1,64.7 40.1,76.355 39.775,76.68 v1(39.775,88.6)
UART2_TX: J3.03 pad.51 | length 66.6
  Top Layer w0.292: pad.51 39.687,94.014 41.2,92.5 v1(41.2,86.9)
  Bottom Layer w0.292: J3.03 41.2,63.26 v1(41.2,86.9)
UARTCTS: J1.13 RN2483.3 | length 55.4
  Top Layer w0.292: RN2483.3 51.6,60.325 55.075,63.8 65.85,63.8 79.29,50.36 84.26,50.36 84.84,50.94 84.84,52.9 J1.13
UARTRTS: J1.12 RN2483.2 | length 49.7
  Top Layer w0.292: RN2483.2 51.995,61.595 54.775,64.375 66.15,64.375 78.965,51.56 J1.12
pads on no net: RN2483.4 RN2483.5 RN2483.15 RN2483.16 RN2483.17 RN2483.18 RN2483.19 RN2483.29 RN2483.42
copper on no net: | length 49.9
  Top Layer w1: 77.9,65 77.9,72 ; 77.95,73.525 77.95,82.925 ; 79.625,71.65 79.7,64.975 ; 84.5,64.9 84.5,71.8 ; 84.8,73.5 84.8,82.8 ; 86.2,65.1 90.8,65.1 ; 86.9,73.7 86.9,79.7

## Polygon pours and split planes (outlines as drawn)
GND on Layer 1 (split plane): 298 vertices, not listed, extent 0.509,0.509 95.376,100.505
+3.3V on Layer 2 (split plane): 298 vertices, not listed, extent 0.509,0.509 95.376,100.505

## Other copper
Top Layer:
  region: 35.248,84.828 35.185,84.828 35.185,85.268 34.808,85.268 34.808,85.331 34.242,85.331 34.242,85.394 34.305,85.394 34.305,85.457 34.871,85.457 34.871,85.519 35.185,85.519 35.185,85.96 35.248,85.96 35.248,86.462 35.311,86.462 35.311,86.337 35.374,86.337 35.374,85.771 35.437,85.771 35.437,85.519 35.751,85.519 35.751,85.457 36.317,85.457 36.317,85.331 35.814,85.331 35.814,85.268 35.437,85.268 35.437,85.017 35.374,85.017 35.374,84.451 35.311,84.451 35.311,84.262 35.248,84.262 35.248,84.765
  region: 44.175,82.376 44.427,82.376 44.427,82.313 44.678,82.313 44.678,82.25 44.238,82.25 44.238,82.188 44.175,82.188 44.175,81.873 44.112,81.873 44.112,81.81 44.05,81.81 44.05,82.188 43.987,82.188 43.987,82.25 43.547,82.25 43.547,82.313 43.798,82.313 43.798,82.376 44.05,82.376 44.05,82.753 44.112,82.753 44.112,82.69 44.175,82.69 44.175,82.439
  region: 59.263,86.525 58.823,86.525 58.823,86.588 58.572,86.588 58.572,86.651 59.012,86.651 59.012,86.714 59.326,86.714 59.326,86.903 59.389,86.903 59.389,87.468 59.452,87.468 59.452,87.343 59.515,87.343 59.515,86.84 59.578,86.84 59.578,86.714 59.892,86.714 59.892,86.651 60.332,86.651 60.332,86.588 60.018,86.588 60.018,86.525 59.578,86.525 59.578,86.4 59.515,86.4 59.515,85.897 59.452,85.897 59.452,85.771 59.389,85.771 59.389,86.274 59.326,86.274 59.326,86.525
  region: 68.442,78.793 68.442,78.73 67.939,78.73 67.939,78.667 67.876,78.667 67.876,78.604 67.813,78.604 67.813,78.101 67.75,78.101 67.75,78.038 67.687,78.038 67.687,78.541 67.624,78.541 67.624,78.667 67.562,78.667 67.562,78.73 67.059,78.73 67.059,78.793 66.933,78.793 66.933,78.856 67.436,78.856 67.436,78.919 67.624,78.919 67.624,79.044 67.687,79.044 67.687,79.547 67.813,79.547 67.813,78.981 67.876,78.981 67.876,78.919 68.002,78.919 68.002,78.856 68.567,78.856 68.567,78.793 68.504,78.793
Bottom Layer:
  region: 3067 vertices and 0 holes, not listed, extent 24.496,73.769 32.517,81.23
Multi-Layer:
  the board outline again, w0.254

## Silkscreen, mask and mechanical layers (free items; w line width, h text height)
Top Overlay:
  drawing of 13 lines, arcs and shapes, not listed
  text "3.3V_OUT" at 20.604,58.196 h1
  text "3V_REG" at 6.179,58.171 h1
  text "PGD_INT" at 87.929,56.071 h1
  text "3.3V_BOARD" at 4.954,55.646 h1
  text "3.3V_OUT" at 20.604,55.571 h1
  text "PGC_INT" at 75.187,53.521 h1
  text "UARTCTS" at 87.929,53.354 h1
  text "L_TX" at 10.785,53.196 h1
  text "UART0_RX" at 20.604,52.996 h1
  text "UARTRTS" at 75.021,51.054 h1
  text "GPIO 13" at 88.704,51.054 h1
  text "UART0_TX" at 20.604,50.646 h1
  text "L_RX" at 10.785,50.571 h1
  text "GPIO 12" at 75.354,48.454 h1
  text "GPIO 11" at 88.704,48.454 h1
  text "UART1_RX" at 20.604,48.096 h1
  text "L_TX" at 10.785,47.896 h1
  text "GPIO 10" at 75.354,45.954 h1
  text "GPIO 8" at 88.704,45.954 h1
  text "L_RX" at 10.785,45.571 h1
  text "UART1_TX" at 20.604,45.546 h1
  text "GPIO 8" at 76.187,43.254 h1
  text "GPIO 7" at 88.704,43.254 h1
  text "UART2_RX" at 20.604,42.921 h1
  text "L_TX" at 10.785,42.896 h1
  text "GPIO 6" at 76.187,40.954 h1
  text "GPIO 5" at 88.704,40.954 h1
  text "UART2_TX" at 20.604,40.571 h1
  text "L_RX" at 10.785,40.471 h1
  text "GPIO 4" at 76.187,38.304 h1
  text "GPIO 3" at 88.704,38.304 h1
  text "DEBUG_0" at 75.154,29.608 h1.52
  text "DEBUG_1" at 75.154,27.008 h1.52
  text "DEBUG_2" at 75.254,24.408 h1.52
  text "SEAN" at 76.75,14.4 h2
  text "DAUPHINEE" at 76.75,11.4 h2
  text "2023" at 7.769,10.1 h2
  text "RF" at 81.533,3.833 h3
  text "REVE" at 3.996,3.808 h3
Bottom Overlay:
  drawing of 25 lines, arcs and shapes, not listed
  text "LED->" at 22.677,88.554 h1 r270